# Altium PCB PCB_ESPDMX V2.pcbdoc
Units mil, origin at the board's own origin, x right, y up, seen from the top; angles counter-clockwise.
Board outline 7260 x 3730 mil, 2 copper layers (Top Layer, Bottom Layer); 60 components, 70 nets, 271 pads, 69 vias.
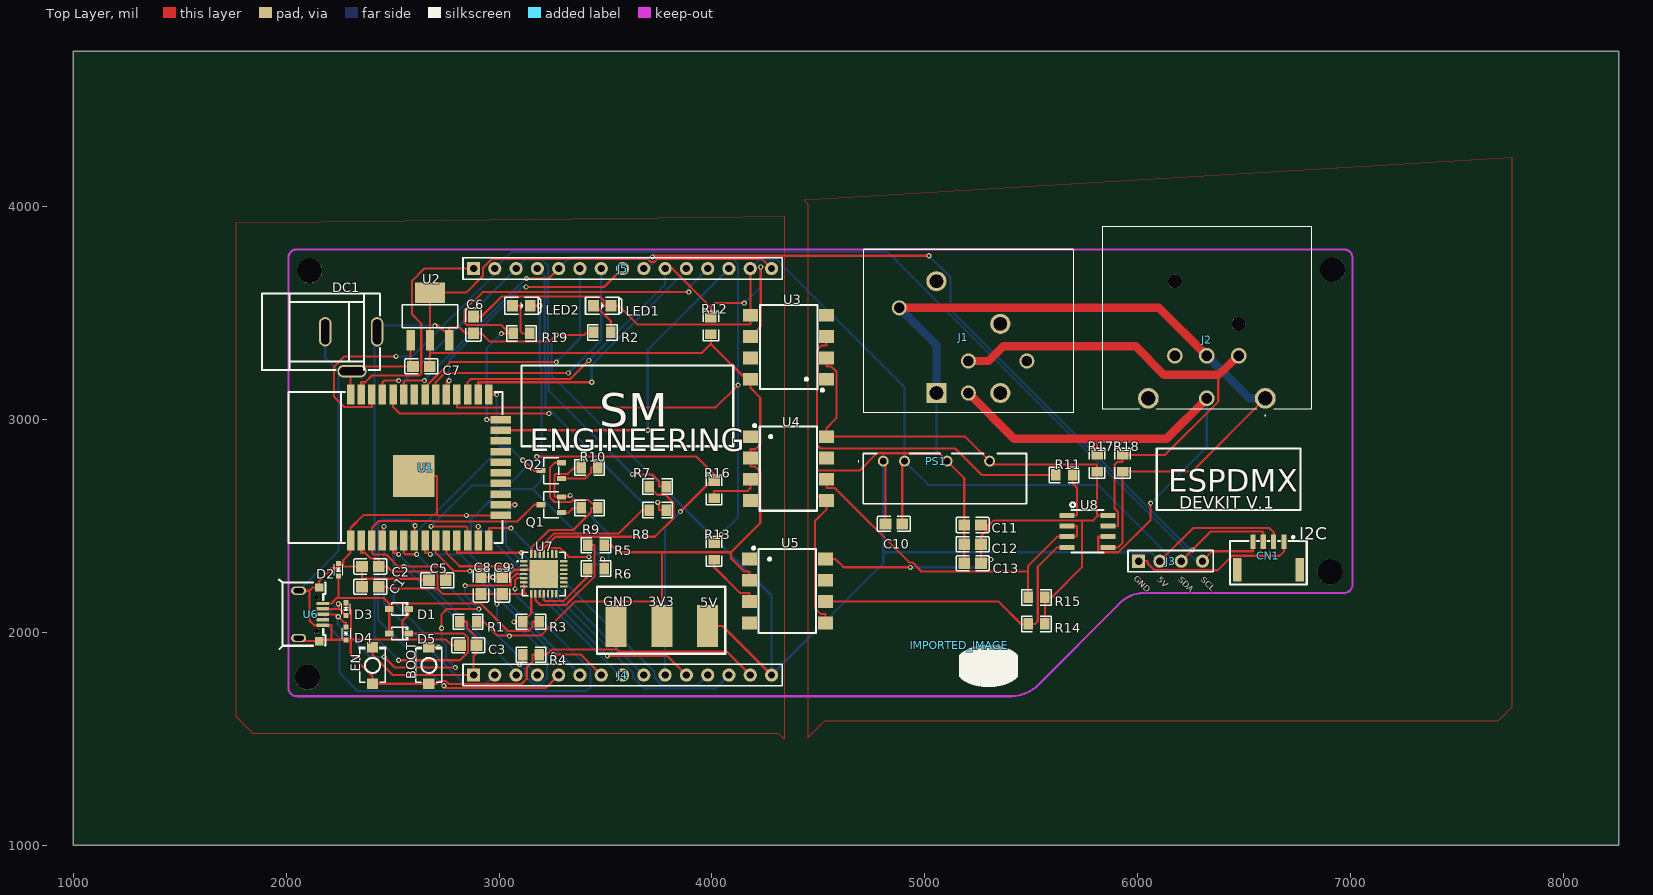
[diagram p0: Top Layer view]
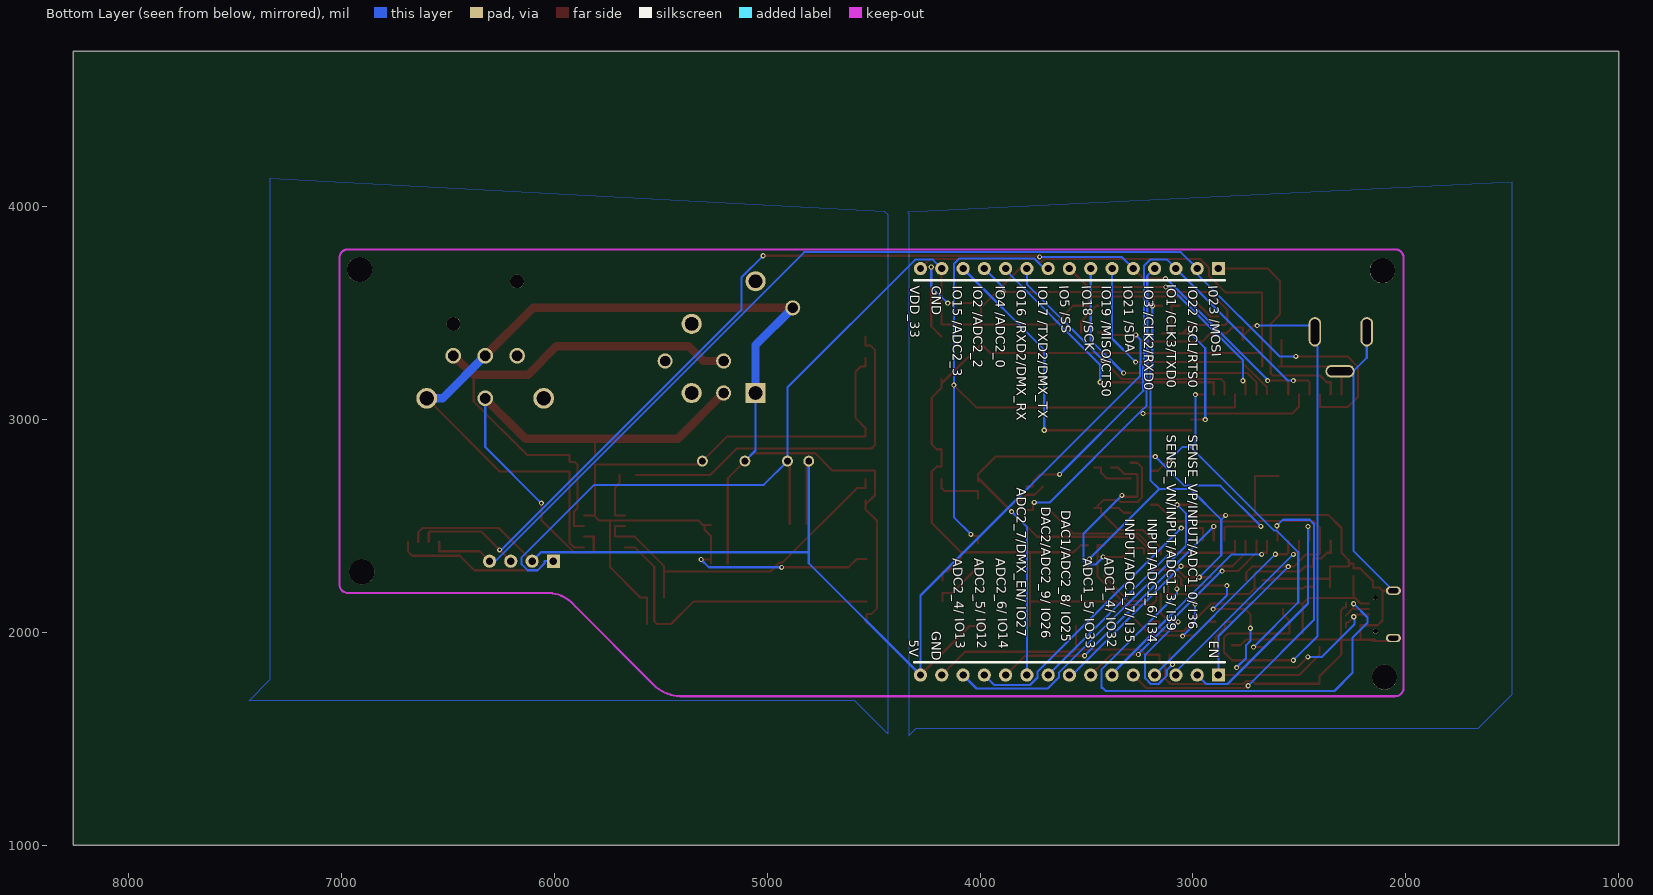
[diagram p1: Bottom Layer view, seen from below]

## Layer stack, top to bottom
Top Layer: signal copper (thickness not stored)
Dielectric: dielectric 12.6, FR-4, Dk 4.8
Bottom Layer: signal copper (thickness not stored)

## Board outline
8260,1000 1000,1000 1000,4730 8260,4730

## Components (designator, comment, footprint, x,y, rotation, side; value= is the part's Value field where it differs from the comment)
BOOT "TS-1088R-02026" SW-SMD_L3.9-W3.0-P4.45 2670,1845 r90 top
C1 "22uF" C0805 2395,2215 r0 top
C2 "0.1u" C0805 2395,2310 r0 top
C3 "0.1u" C0805 2855,1940 r0 top
C5 "0.1u" C0805 2710,2245 r180 top
C6 "22uF" C0805 2880,3445 r270 top
C7 "22uF" C0805 2635,3250 r0 top
C8 "4.7uF" C0805 2915,2220 r270 top
C9 "0.1u" C0805 3015,2220 r270 top
C10 "4.7uF" C0805 4855,2510 r180 top
C11 "0.1u" C0805 5225,2505 r0 top
C12 "0.1u" C0805 5225,2415 r0 top
C13 "0.1u" C0805 5225,2325 r0 top
CN1 "BM04B-GHS-TBT(LF)(SN)" CONN-SMD_4P-P1.25_BM04B-GHS-TBT-LF-SN 6615.05,2360.05 r0 top
D1 "BAT760-7" SOD-323_L1.8-W1.3-LS2.5-RD 2530,2110 r180 top
D2 "LESD5D5.0CT1G" SOD-523_L1.2-W0.8-LS1.6-BI 2245,2295 r90 top
D3 "LESD5D5.0CT1G" SOD-523_L1.2-W0.8-LS1.6-BI 2280,2110 r90 top
D4 "LESD5D5.0CT1G" SOD-523_L1.2-W0.8-LS1.6-BI 2280,1995 r270 top
D5 "BAT760-7" SOD-323_L1.8-W1.3-LS2.5-RD 2530,1995 r180 top
DC1 "DC-470-2.1GP" DC-IN-TH_DC-470-2.1GP 2305,3320 r0 top
EN "TS-1088R-02026" SW-SMD_L3.9-W3.0-P4.45 2405,1845 r90 top
IMPORTED_IMAGE "IMPORTED_IMAGE" IMPORTED_IMAGE 5161.84,1940.86 r0 top
J1 "DMX-5 F" AC5FAHAUB 5055,3125 r0 top
J2 "DMX-5 M" AC5MAHAUB 6600,3100 r0 top
J3 "HDR-M-2.54_1x4" HDR-M-2.54_1X4 6155,2335 r0 top
J4 "HDR-M-2.54_1x15" HDR-M-2.54_1X15 3580,1800 r0 top
J5 "HDR-M-2.54_1x15" HDR-M-2.54_1X15 3580,3710 r0 top
LED1 "LED-0805_R" LED0805_RED 3485.05,3534.95 r0 top
LED2 "LED-0805_B" LED0805_BLUE 3105.05,3534.95 r0 top
PS1 "TEA_1-0505E" TEA10505E 4805,2805 r0 top
Q1 "SS8050-G" SOT-23-3_L2.9-W1.6-P1.90-LS2.8-BR 3245,2600 r0 top
Q2 "SS8050-G" SOT-23-3_L2.9-W1.6-P1.90-LS2.8-BR 3245,2760 r0 top
R1 "10k" R0805 2855,2050 r0 top
R2 "2k" R0805 3485,3410 r180 top
R3 "22.1k" R0805 3150,2050 r180 top
R4 "47.5k" R0805 3150,1895 r180 top
R5 "2k" R0805 3455,2410 r180 top
R6 "10k" R0805 3455,2300 r180 top
R7 "0R" R0805 3745,2685 r0 top
R8 "0R" R0805 3745,2575 r0 top
R9 "10k" R0805 3425,2585 r180 top
R10 "10k" R0805 3425,2775 r0 top
R11 "470R" R0805 5655,2740 r0 top
R12 "470R" R0805 3995,3440 r90 top
R13 "330R" R0805 4010,2380 r90 top
R14 "470R" R0805 5525,2040 r0 top
R15 "470R" R0805 5525,2165 r0 top
R16 "330R" R0805 4010,2670 r90 top
R17 "680R" R0805 5810,2795 r90 top
R18 "680R" R0805 5930,2795 r270 top
R19 "2k" R0805 3105,3405 r180 top
U1 "ESP32-WROOM-32(16MB)" WIFIM-SMD_39P-L25.5-W18.0-P1.27 2655,2775 r90 top
U2 "AMS1117-3.3V" SOT-223-4_L6.5-W3.5-P2.30-LS7.0-BR 2675,3485 r270 top
U3 "6N137S" SOP-8_L9.8-W6.6-P2.54-LS10.3-BL 4360,3340 r90 top
U4 "6N137S" SOP-8_L9.8-W6.6-P2.54-LS10.3-BL 4360,2770 r270 top
U5 "6N137S" SOP-8_L9.8-W6.6-P2.54-LS10.3-BL 4355,2195 r270 top
U6 "USB-MR-D-023" MICRO-USB-SMD_USB-MR-D-023 2115,2085 r270 top
U7 "CP2102N-A02-GQFN28R" QFN-28_L5.0-W5.0-P0.50-TL-EP3.3 3210,2275 r0 top
U8 "MAX3485CSA+T" SO-8_L4.9-W3.9-P1.27-LS6.0-BL 5765,2475 r270 top
? "" ? 2073.44,2755 r0 top

## Footprints (in the part's own frame and the unit in brackets; to place one, negate y for a bottom-side part, rotate by r counter-clockwise, add the part's x,y. Pads: shape width x height; smd on the part's side, far side on the other; paste and mask are expansions set on the pad)
AC5FAHAUB [mil]
  rect 94.49x94.49 hole 63 paste+0 mask+2: 1(0,0)
  round 70.87 hole 47.24 slot 47.44 at 0 deg paste+0 mask+2: 2(150,150.39) 3(150,0) 4(424.8,150.39) G1(-174.8,400.39)
  round 94.49 hole 63 paste+0 mask+2: 5(300,0) 7(0,525.2) 8(300,325.2)
  silkscreen extent -342,-93 642,675
AC5MAHAUB [mm]
  round 2.475 hole 1.65 slot 1.655 at 0 deg paste+0 mask+0.051: 1(0,0) 5(-13.96,0)
  round 1.875 hole 1.25 paste+0 mask+0.051: 2(-3.17,5.08) 3(-6.98,0) 4(-10.79,5.08) G1(-6.98,5.08)
  round 1.65 hole 1.65 unplated paste+0: ""(-10.79,13.97) ""(-3.17,8.89)
  silkscreen extent -19.48,-2.1 5.52,20.48
C0805 [mm]
  rect 1.41x1.35 smd paste-100 mask+0.051: 1(-1,0) 2(1,0)
  silkscreen extent -1.96,-0.9 1.96,0.9
CONN-SMD_4P-P1.25_BM04B-GHS-TBT-LF-SN [mm]
  rect 0.6x1.7 smd paste+0 mask+0.051: 1(1.875,1.675) 2(0.625,1.675) 3(-0.625,1.675) 4(-1.875,1.675)
  rect 1x2.8 smd paste+0 mask+0.051: 5(3.725,-1.675) 6(-3.725,-1.675)
  silkscreen extent -4.57,-3.43 4.57,2.35
DC-IN-TH_DC-470-2.1GP [mm]
  oval 1.5x3.5 hole 1 slot 3 at 90 deg paste+0 mask+0.051: 1(3.1,2.35) 2(-3.1,2.35)
  oval 3.5x1.5 hole 1 slot 3 at 0 deg paste+0 mask+0.051: 3(0.1,-2.35)
  silkscreen extent -10.64,-2.22 3.42,6.92
HDR-M-2.54_1X4 [mil]
  rect 62x62 hole 35 paste+0 mask+2: 1(-150,0)
  round 62 hole 35 paste+0 mask+2: 2(-50,0) 3(50,0) 4(150,0)
  silkscreen extent -200,-50 200,50
HDR-M-2.54_1X15 [mil]
  rect 62x62 hole 35 paste+0 mask+2: 1(-700,0)
  round 62 hole 35 paste+0 mask+2: 2(-600,0) 3(-500,0) 4(-400,0) 5(-300,0) 6(-200,0) 7(-100,0) 8(0,0) 9(100,0) 10(200,0) 11(300,0) 12(400,0) 13(500,0) 14(600,0) 15(700,0)
  silkscreen extent -750,-50 750,50
IMPORTED_IMAGE [mil]
  silkscreen extent 0,-197 276,0
LED0805_BLUE [mil]
  rect 51.2x55.1 smd paste+0 mask+2: 1(-41.35,0) 2(41.35,0)
  silkscreen extent -79,-39 91,39
LED0805_RED [mil]
  rect 51.2x55.1 smd paste+0 mask+2: 1(-41.35,0) 2(41.35,0)
  silkscreen extent -79,-39 91,39
MICRO-USB-SMD_USB-MR-D-023 [mm]
  rect 0.4x1.5 smd paste-100 mask+0.05: 1(-1.3,1.45) 2(-0.65,1.45) 3(0.001,1.45) 4(0.651,1.45) 5(1.3,1.45)
  rect 1x1 smd paste-100 mask+0.05: 6(-3.2,1) 7(3.2,1)
  oval 1x1.8 hole 0.6 slot 1.2 at 90 deg paste+0 mask+0.05: 6(-2.826,-1.45) 7(2.824,-1.45)
  round 0.6 hole 0.6 unplated paste+0: ""(-2,0.7) ""(2,0.7)
  silkscreen extent -4.15,-3.8 4.15,1.75
QFN-28_L5.0-W5.0-P0.50-TL-EP3.3 [mm]
  rect 0.905x0.28 smd paste-100 mask+0.051: 1(-2.377,1.5) 2(-2.377,1) 3(-2.377,0.5) 4(-2.377,0) 5(-2.377,-0.5) 6(-2.377,-1) 7(-2.377,-1.5) 15(2.377,-1.5) 16(2.377,-1) 17(2.377,-0.5) 18(2.377,0) 19(2.377,0.5) 20(2.377,1) 21(2.377,1.5)
  rect 0.28x0.905 smd paste-100 mask+0.051: 8(-1.5,-2.377) 9(-1,-2.377) 10(-0.5,-2.377) 11(0,-2.377) 12(0.5,-2.377) 13(1,-2.377) 14(1.5,-2.377) 22(1.5,2.377) 23(1,2.377) 24(0.5,2.377) 25(0,2.377) 26(-0.5,2.377) 27(-1,2.377) 28(-1.5,2.377)
  rect 3.35x3.35 smd paste-100 mask+0.051: 29(0,0)
  silkscreen extent -3.2,-2.58 2.58,2.58
R0805 [mil]
  rect 44.59x54.21 smd paste-3937.01 mask+2: 1(-39.37,0) 2(39.37,0)
  silkscreen extent -69,-36 69,36
SO-8_L4.9-W3.9-P1.27-LS6.0-BL [mm]
  rect 0.6x1.8 smd paste+0 mask+0.05: 1(-1.905,-2.45) 2(-0.635,-2.45) 3(0.635,-2.45) 4(1.905,-2.45) 5(1.905,2.45) 6(0.635,2.45) 7(-0.635,2.45) 8(-1.905,2.45)
  silkscreen extent -3.46,-2.06 2.54,1.91
SOD-323_L1.8-W1.3-LS2.5-RD [mm]
  rect 1x0.75 smd paste+0 mask+0.051: 1(-1.173,0) 2(1.173,0)
  silkscreen extent -1.08,-0.8 0.9,0.8
SOD-523_L1.2-W0.8-LS1.6-BI [mm]
  rect 0.6x0.6 smd paste+0 mask+0.051: 1(-0.75,0) 2(0.75,0)
  silkscreen extent -0.65,-0.5 0.65,0.5
SOP-8_L9.8-W6.6-P2.54-LS10.3-BL [mm]
  rect 1.525x1.78 smd paste+0 mask+0.051: 1(-3.81,-4.545) 2(-1.27,-4.545) 3(1.27,-4.545) 4(3.81,-4.545) 5(3.81,4.545) 6(1.27,4.545) 7(-1.27,4.545) 8(-3.81,4.545)
  silkscreen extent -5.27,-4.19 5.03,3.39
SOT-23-3_L2.9-W1.6-P1.90-LS2.8-BR [mm]
  rect 1.07x0.6 smd paste+0 mask+0.051: 1(1.235,-0.95) 2(1.235,0.95) 3(-1.235,0)
  silkscreen extent -0.88,-1.54 0.88,1.54
SOT-223-4_L6.5-W3.5-P2.30-LS7.0-BR [mm]
  rect 2.47x0.98 smd paste+0 mask+0.051: 1(2.835,-2.3) 2(2.835,0) 3(2.835,2.3)
  rect 2.47x3.6 smd paste+0 mask+0.051: 4(-2.835,0)
  silkscreen extent -1.37,-3.33 1.37,3.33
SW-SMD_L3.9-W3.0-P4.45 [mm]
  rect 1.23x1.36 smd paste+0 mask+0.051: 1(-2.185,0) 2(2.185,0)
  silkscreen extent -2.03,-1.62 2.25,1.62
TEA10505E [mil]
  round 51.3 hole 29.92 slot 30.12 at 0 deg paste+0 mask+2: 1(0,0) 2(100,0) 4(300,0) 6(500,0)
  silkscreen extent -118,-201 673,35
WIFIM-SMD_39P-L25.5-W18.0-P1.27 [mm]
  rect 2.4x0.9 smd paste+0 mask+0.051: 1(-8.7,8.965) 2(-8.7,7.695) 3(-8.7,6.425) 4(-8.7,5.155) 5(-8.7,3.885) 6(-8.7,2.615) 7(-8.7,1.345) 8(-8.7,0.075) 9(-8.7,-1.195) 10(-8.7,-2.465) 11(-8.7,-3.735) 12(-8.7,-5.005) 13(-8.7,-6.275) 14(-8.7,-7.545) 25(8.7,-7.545) 26(8.7,-6.275) 27(8.7,-5.005) 28(8.7,-3.735) 29(8.7,-2.465) 30(8.7,-1.195) 31(8.7,0.075) 32(8.7,1.345) 33(8.7,2.615) 34(8.7,3.885) 35(8.7,5.155) 36(8.7,6.425) 37(8.7,7.695) 38(8.7,8.965)
  rect 0.9x2.4 smd paste+0 mask+0.051: 15(-5.715,-8.965) 16(-4.445,-8.965) 17(-3.175,-8.965) 18(-1.905,-8.965) 19(-0.635,-8.965) 20(0.635,-8.965) 21(1.905,-8.965) 22(3.175,-8.965) 23(4.445,-8.965) 24(5.715,-8.965)
  rect 5x5 smd paste+0 mask+0.051: 39(-1.017,1.422)
  silkscreen extent -9.02,-9.17 9.02,16.39
? [mil]

## Free pads (board coordinates)
  rect 98.42x196.85 smd paste+0 mask+4: 1(3550,2030) 1(3765,2030) 1(3980,2030)
  round 118.11 hole 118.11 unplated paste+0: ""(2100,1790) ""(2110,3700) ""(6905,2285) ""(6915,3705)

## Via types
v1: diameter 24.02, hole 12.01, Top Layer to Bottom Layer, tented both sides, 69 vias

## Nets (pads, with @x,y where several pads share a name; then routed paths per layer and width w, separated by ;. In a path a pad name is that pad's centre, name@x,y a point inside that pad or via, vN(x,y) a via of type N, cw(c..) or ccw(c..) an arc to the next point about the centre after c; other vN are vias at no path point)
485/RX: J5.9 R13.2 U1.28 | length 3270.5
  Top Layer w10: U1.28 2802.05,3059.34 2803.8,3057.58 4018.41,3057.58 v1(4123.13,3162.29) ; R13.2 4010.01,2452.6 4034.72,2452.6 v1(4042.92,2460.8)
  Bottom Layer w10: J5.9 3698.89,3710 3746.62,3757.73 4096.74,3757.73 4123.12,3731.35 v1(4123.13,3162.29) 4123.12,2541.01 v1(4042.92,2460.8)
485/TX: J5.10 R12.2 U1.27 U3.6 | length 2303.8
  Top Layer w10: U1.27 2852.05,3175.69 2868.09,3191.73 3335.53,3191.73 v1(3421.74,3277.94) ; J5.10 3812.8,3710 3995.01,3527.79 ; R12.2 3995.01,3512.6 3995.01,3527.79 ; v1(4152.1,3547.29) 4014.51,3547.29 3995.01,3527.79 ; U3.6 4229.56,3438.5 v1(4229.58,3717.08)
  Bottom Layer w10: v1(3421.74,3277.94) 3780.01,3636.21 J5.10 ; v1(4152.1,3547.29) 4229.57,3624.77 v1(4229.58,3717.08)
A: J1.3 J2.3 R17.2 U8.6 | length 2471
  Top Layer w10: R17.2 5810.01,2867.6 5810.01,2909.5 ; U8.6 5815.1,2450 5815.06,2449.95 5815.06,2380.12 5818.19,2376.98 5909.98,2376.98 6061.48,2528.47 v1(6061.48,2607.67)
  Top Layer w39.37: J1.3 5420.51,2909.5 5810.01,2909.5 6134.7,2909.5 J2.3
  Bottom Layer w10: v1(6061.48,2607.67) 6325.2,2871.4 J2.3
B: J1.2 J2.2 R18.1 U8.7 | length 2500.5
  Top Layer w10: U8.7 5907.82,2500 5907.9,2500.07 5907.9,2566.37 5891.4,2582.87 5891.4,2787.45 5905.1,2801.15 5930.01,2801.15 R18.1 6128.86,2834.37 6379.22,3084.72 6379.22,3223.55
  Top Layer w39.37: J1.2 5300.39,3275.39 5370,3345 5990,3345 6125,3210 6379.22,3210 J2.2
CLK: U1.20
CMD: U1.19
DMX_EN: J4.10 R16.2 U1.12 | length 2787.9
  Top Layer w10: v1(2680.38,2498.57) 2844.14,2498.57 2852.05,2490.66 U1.12 ; v1(3176.71,2826.61) 3925.99,2826.61 4010.01,2742.6 R16.2@4010.01,2725.99 ; v1(3852.11,2568.09) R16.2@4010.01,2725.99 ; R16.2 R16.2@4010.01,2725.99
  Bottom Layer w10: v1(2680.38,2498.57) 2871.66,2689.86 3039.95,2689.86 v1(3176.71,2826.61) ; J4.10 3780.01,2495.99 v1(3852.11,2568.09)
DTR: Q2.2 R9.1 U7.28 | length 880.3
  Top Layer w10: U7.28@3150.95,2368.6 3150.95,2397.35 3235.3,2481.7 3349.03,2481.7 3431.16,2563.82 3431.16,2585 R9.1@3447.76,2585 ; Q2.2 3261.64,2797.4 3238.43,2774.19 3238.43,2634.81 3260.11,2613.12 3338.47,2613.12 3348.43,2623.09 3419.2,2623.09 3447.76,2594.53 R9.1@3447.76,2585 ; R9.1 R9.1@3447.76,2585
EN: C3.2 C5.1 EN.2 J4.1 Q1.3 R1.1 U1.3 | length 2884.6
  Top Layer w10: EN.2 2405.01,1895.88 2500.89,1800 J4.1 2880.01,1888.13 2894.38,1902.5 C3.2 2894.38,1977.51 2848.86,2023.03 2848.86,2050 R1.1 ; C5.1 2749.38,2282.51 2722.39,2309.5 v1(2552.17,2309.5) 2526.41,2309.5 2469.61,2366.31 2410.05,2366.31 2402.05,2374.31 U1.3 2402.05,2461.58 2402.05,2490.66 2435.78,2524.4 2687.05,2524.4 2690.14,2521.3 3085.7,2521.3 3164.39,2600 Q1.3
  Bottom Layer w10: v1(2552.17,2309.5) 2880.01,1981.66 J4.1
EXT5V: C6.2 C10.2 CN1.2 D1.1 D5.1 DC1.1 J3.2 J4.15 pad.1@3980,2030 PS1.1 R2.2 U2.3 | length 9527.2
  Top Layer w10: v1(2528.2,1869.63) 2816.07,1869.63 2854.38,1907.93 2854.38,1974.65 2834.03,1995 D5.1 2545.55,1995 2545.55,2053.7 2576.16,2084.31 D1.1 ; v1(2698.61,3441.64) 2715.41,3441.64 U2.3@2765.55,3391.49 ; U2.3 U2.3@2765.55,3391.49 ; R2.2 3412.41,3410 3400.28,3397.87 v1(3268.68,3397.87) 3237.26,3366.45 2956.7,3366.45 2917.51,3405.63 C6.2 2842.51,3405.63 2815.2,3432.94 2765.55,3432.94 U2.3@2765.55,3391.49 ; pad.1@3980.01,2030 4050.01,2030 J4.15 ; PS1.1 4815.64,2794.37 C10.2 ; J3.2 6260.98,2490.97 6619.1,2490.97 6639.65,2470.42 CN1.2@6639.65,2425.99
  Bottom Layer w10: v1(2528.2,1869.63) 2414.95,1982.88 2414.95,3400.41 2427.05,3412.52 2456.18,3441.64 v1(2698.61,3441.64) ; v1(3268.68,3397.87) 3246.28,3375.47 3246.28,3260.89 3249.47,3257.69 3249.47,3203.86 4280.01,2173.33 J4.15 4805.01,2325 4805.01,2377.15 ; PS1.1 4805.01,2377.15 ; J3.2 6062.85,2377.15 4805.01,2377.15
GND: BOOT.1 C1.1 C2.1 C3.1 C5.2 C6.1 C7.1 C8.1 C9.1 C10.1 CN1.1 D2.2 D3.2 D4.2 DC1.2 DC1.3 EN.1 J3.1 J4.14 J5.14 LED1.2 LED2.2 pad.1@3550,2030 PS1.2 R4.1 R6.1 U1.1 U1.15 U1.38 U1.39 U2.1 U3.5 U6.5 U6.6 U6.7 U7.3 U7.29 | length 15797.6
  Top Layer w10: U6.7@2057.93,1973.78 2072.68,1959.02 U6.7@2139.07,1959.02 ; U6.6@2057.93,2196.22 2108.99,2196.22 ; U6.7@2154.38,1959.02 U6.7@2139.07,1959.02 ; D3.2 2280.01,2116.79 2291.38,2116.79 2303.49,2104.67 2303.49,1966.22 ; U1.38 2302.05,3220.58 DC1.3 2331.47,3250 C7.1@2584.45,3250 ; C1.1 2355.64,2248.55 2355.64,2252.56 ; U2.1@2584.45,3373.39 C7.1@2584.45,3250 ; C7.1 2590.05,3250 C7.1@2584.45,3250 ; U1.39 2708.38,2734.96 2708.38,2552.7 ; C5.2 2631.95,2245 2624.39,2252.56 2355.64,2252.56 ; C3.1 2776.95,1940 2750.72,1966.22 2303.49,1966.22 ; C6.1 2898.76,3484.37 2917.51,3484.37 3011.74,3578.59 3182.89,3578.59 ; C8.1 v1(2969.65,2259.37) C9.1 3036.91,2259.37 3072.22,2294.68 U7.3 3190.32,2294.68 U7.29 ; U1.15 v1(2846.14,2550) 2711.07,2550 2708.38,2552.7 ; LED2.2 3164.62,3535 v1@3182.89,3535 ; v1(3191.12,3535) v1@3182.89,3535 ; v1(3486.4,2345.21) 3493.57,2338.04 3494.38,2338.04 R6.1 ; pad.1@3550.01,2030 3550.01,1920.65 ; J4.14 4070.7,1909.31 3561.34,1909.31 3550.01,1920.65 ; J5.14 4181.06,3708.94 U3.5 4181.06,3449.05 4178.11,3446.1 3651.78,3446.1 3562.89,3535 LED1.2 3489.82,3535 3489.82,3562.4 3473.64,3578.59 3182.89,3578.59 ; C10.1 4894.38,2794.37 PS1.2 ; J3.1 6046.94,2335 6046.94,2324.52 6079.31,2292.15 6376.14,2292.15 6444.19,2360.2 6667.49,2360.2 6688.85,2381.56 CN1.1@6688.85,2425.99 ; 2108.99,2196.22 2123.76,2210.98 2139.07,2210.98 2154.38,2210.98 2154.38,2241.6 2214.57,2301.79 2245.01,2301.79 D2.2 2250.7,2324.53 D2.2@2256.38,2324.53 ; 2108.99,2196.22 2108.99,2056.44 2131.62,2033.81 U6.5 2212.55,2033.81 2212.55,1965.47 ; U6.7@2139.07,1959.02 2145.51,1965.47 2212.55,1965.47 ; 2212.55,1965.47 D4.2 2302.74,1965.47 2303.12,1965.47 ; D2.2@2256.38,2324.53 2270.91,2310 C2.1 2355.64,2252.56 ; D2.2@2256.38,2324.53 2267.74,2324.53 2267.74,2340.01 2302.05,2374.31 U1.1 2302.05,2490.66 2364.09,2552.7 2708.38,2552.7 ; 2303.12,1965.47 2303.12,1896 2405.01,1794.12 EN.1 BOOT.1 2707.7,1758.98 2721.38,1772.65 2749.91,1772.65 2764.55,1758.02 3105.53,1758.02 3130.01,1782.5 3130.01,1835.63 3156.16,1861.78 3156.16,1895 R4.1 3222.61,1895 3222.61,1895.43 3247.82,1920.65 3550.01,1920.65 ; 2303.12,1965.47 2303.12,1965.85 2303.49,1966.22 ; v1@3182.89,3535 3182.89,3578.59
  Bottom Layer w10: U6.6@2057.93,2196.22 2245.95,2384.25 DC1.3@2245.95,3227.48 ; DC1.2 2182.97,3290.47 DC1.3@2245.95,3227.48 ; DC1.3 DC1.3@2245.95,3227.48 ; v1(2846.14,2550) 2866.72,2529.43 ; v1(2969.65,2259.37) 2866.72,2362.3 2866.72,2529.43 ; v1(3191.12,3535) 3191.11,3248.31 3199.68,3239.74 3199.68,2715.84 3157.72,2673.88 ; v1(3486.4,2345.21) 3157.72,2673.88 ; J5.14 4222.02,3752.01 4304.99,3752.01 4905.01,3152 PS1.2 5016.48,2693.52 5813.24,2693.52 6154.02,2352.75 6154.02,2320.55 6125.76,2292.29 6079.16,2292.29 6046.94,2324.52 6046.94,2335 J3.1 ; 2866.72,2529.43 3011.16,2673.88 3157.72,2673.88
GND-ISO: C11.1 C12.1 C13.1 J1.1 J1.G1 J2.1 J2.G1 PS1.4 R18.2 U4.5 U5.5 U8.5 | length 5918.7
  Top Layer w10: U5.5 4533.94,2085.95 4510.91,2085.95 4483.8,2113.07 4483.8,2523.9 4538.94,2579.05 U4.5@4538.94,2599.53 ; U4.5 U4.5@4538.94,2599.53 ; C13.1 C12.1 C11.1 5185.64,2724.37 PS1.4 5067.85,2842.15 4775.1,2842.15 4693.94,2761 4495.84,2761 4492.93,2758.09 4492.93,2645.55 U4.5@4538.94,2599.53 ; U8.5 5907.82,2400 5930.01,2422.18 R18.2 6255.64,2755.63 J2.1
  Top Layer w39.37: J1.G1 6099.81,3525.39 J2.G1
  Bottom Layer w10: J1.1 5055.01,2855 PS1.4
  Bottom Layer w39.37: J1.G1 5055.01,3350.59 J1.1 ; J2.G1 6525.2,3100 J2.1
IO0: BOOT.2 Q2.3 U1.25 | length 1812.1
  Top Layer w10: BOOT.2 2707.7,1931.02 v1(2715.42,1931.02) ; U1.25 v1(2988.59,3117.51) ; v1(3111.25,2808.92) 3115.47,2808.92 3164.39,2760 Q2.3
  Bottom Layer w10: v1(2715.42,1931.02) 2504.95,2141.48 2504.95,2376.55 2606.84,2478.44 2617.3,2478.44 3009.39,2870.53 ; v1(2988.59,3117.51) 2988.59,2891.34 3009.39,2870.53 ; v1(3111.25,2808.92) 3049.64,2870.53 3009.39,2870.53
IO2: J5.12 R19.2 U1.24 | length 2096.9
  Top Layer w10: v1(2941.84,3000) U1.24@3007.95,3000 ; v1(3010.73,3404.43) 3031.84,3404.43 3032.41,3405 R19.2 3049.03,3405 3009.66,3444.37 2849.26,3444.37 2838.74,3454.89 2838.74,3515.53 2922.53,3599.31 v1(3891,3599.31)
  Bottom Layer w10: v1(2941.84,3000) 2941.84,3335.54 v1(3010.73,3404.43) ; v1(3891,3599.31) 3891.01,3621 J5.12
IO4: J5.11 U1.26 | length 1309.8
  Top Layer w10: U1.26 2902.05,3175.69 2902.09,3175.74 v1@3435.14,3175.74
  Bottom Layer w10: v1@3435.14,3175.74 3435.14,3256.39 3880.01,3701.25 J5.11
  other v1: 3435.15,3175.74
IO5: J5.8 U1.29 | length 1164.2
  Top Layer w10: U1.29 2752.05,3175.69 2757.68,3175.69 v1(2764.82,3182.83) ; v1(3126.67,3623.21) 3493.22,3623.21 J5.8
  Bottom Layer w10: v1(2764.82,3182.83) 2764.82,3279.76 3108.26,3623.21 v1(3126.67,3623.21)
IO12: J4.12 U1.14 | length 1426.7
  Top Layer w10: U1.14 2952.05,2490.66 v1(3054.64,2490.66)
  Bottom Layer w10: v1(3054.64,2490.66) 3730.01,1815.28 3730.01,1788.68 3765.7,1752.99 3932.99,1752.99 J4.12
IO13: J4.13 U1.16 | length 1640.9
  Top Layer w10: U1.16 3066.14,2600 v1(3074.22,2600)
  Bottom Layer w10: v1(3074.22,2600) 3031.64,2557.42 3031.64,2408.24 3630.01,1809.88 3630.01,1788.67 3682.05,1736.63 4016.64,1736.63 J4.13
IO14: J4.11 U1.13 | length 1332.3
  Top Layer w10: U1.13 v1(2902.05,2497.78) ; v1(3509.09,1890.73) 3789.28,1890.73 J4.11
  Bottom Layer w10: v1(2902.05,2497.78) v1(3509.09,1890.73)
IO15: J5.13 U1.23 | length 1608.6
  Top Layer w10: U1.23@3007.95,2950 v1(3698.5,2950)
  Bottom Layer w10: v1(3698.5,2950) 3698.51,3328.5 J5.13
IO18: J5.7 U1.30 | length 1254.7
  Top Layer w10: U1.30 2702.05,3175.69 2745.49,3219.13 v1(3325.9,3219.13)
  Bottom Layer w10: v1(3325.9,3219.13) 3480.01,3373.24 J5.7
IO19: J5.6 U1.31 | length 1186.1
  Top Layer w10: U1.31 2652.05,3151.72 2770.72,3270.4 v1(3269.26,3270.4)
  Bottom Layer w10: v1(3269.26,3270.4) 3380.01,3381.15 J5.6
IO23: J5.1 U1.37 | length 1124.2
  Top Layer w10: U1.37 2352.05,3175.69 2371.39,3175.69 2403.03,3207.32 2625.34,3207.32 2634.38,3216.35 2634.38,3451.17 2591.39,3494.15 2591.39,3653.31 2648.09,3710 J5.1
IO25: J4.8 U1.10 | length 1124
  Top Layer w10: U1.10 2752.05,2374.31 2815.28,2311.07 v1(3056.09,2311.07)
  Bottom Layer w10: v1(3056.09,2311.07) 3567.16,1800 J4.8
IO26: J4.9 U1.11 | length 1174
  Top Layer w10: U1.11 2802.05,2374.31 2802.09,2374.26 v1(3105.74,2374.26)
  Bottom Layer w10: v1(3105.74,2374.26) J4.9
IO32: J4.6 U1.8 | length 1026.8
  Top Layer w10: U1.8 2652.05,2374.31 2670.36,2374.31 v1(2677.57,2367.11)
  Bottom Layer w10: v1(2677.57,2367.11) 2817.68,2367.11 3380.01,1804.78 J4.6
IO33: J4.7 U1.9 | length 1076.1
  Top Layer w10: U1.9 2702.05,2374.31 2788.26,2288.09 v1(2862.72,2288.09) ; v1(3255.98,1896.31) 3383.7,1896.31 J4.7
  Bottom Layer w10: v1(2862.72,2288.09) 2867.68,2288.09 3255.97,1899.79 v1(3255.98,1896.31)
IO34: J4.4 U1.6 | length 924
  Top Layer w10: U1.6 2552.05,2374.31 2559.09,2367.26 v1@2612.74,2367.26
  Bottom Layer w10: v1@2612.74,2367.26 J4.4
  other v1: 2612.75,2367.26
IO35: J4.5 U1.7 | length 1721.8
  Top Layer w10: U1.7 2602.05,2498.15 v1(2605.32,2501.42) ; v1(2740.4,1749.67) 2751.09,1738.98 3218.99,1738.98 J4.5
  Bottom Layer w10: v1(2605.32,2501.42) 2577.41,2529.33 2450.72,2529.33 2430.93,2509.53 2430.93,2059.14 v1(2740.4,1749.67)
Q1_1: Q1.1 R9.2 | length 101.3
  Top Layer w10: Q1.1 3325.62,2562.6 3348.03,2585 R9.2
Q2_1: Q2.1 R10.2 | length 207
  Top Layer w10: Q2.1 3403.66,2722.6 3431.16,2750.09 3431.16,2775 R10.2
R2_1: LED1.1 R2.1 | length 163.8
  Top Layer w10: LED1.1 3452.82,3535 3524.38,3463.45 R2.1
R19_1: LED2.1 R19.1 | length 204.3
  Top Layer w10: LED2.1 3100.18,3535 3100.18,3415.97 3111.16,3405 R19.1
RTS: Q1.2 R10.1 U7.24 | length 1047.7
  Top Layer w10: U7.24 3229.7,2391.52 3235.57,2397.4 3285.55,2397.4 3328.24,2354.72 v1(3422.07,2354.72) ; v1(3333.4,2643.86) 3326.93,2637.4 3325.62,2637.4 Q1.2 3261.64,2637.4 3259.57,2639.47 3259.57,2737.4 3267.55,2745.39 3322.8,2745.39 3352.41,2775 R10.1
  Bottom Layer w10: v1(3333.4,2643.86) 3514.05,2463.2 3514.05,2337.16 3496.49,2319.59 3457.2,2319.59 v1(3422.07,2354.72)
RXD: R7.1 U7.25 | length 911.9
  Top Layer w10: U7.25 3210.01,2394.43 3265.32,2449.75 3731.74,2449.75 3820.05,2538.06 3820.05,2608.43 3781.57,2646.91 3743.72,2646.91 R7.1
RXD0: J5.4 R8.2 U1.34 | length 2265.1
  Top Layer w10: U1.34 2502.05,3059.34 2532.49,3028.9 v1(3234.56,3028.9) ; v1(3745.33,2611.34) 3751.16,2605.51 3751.16,2575 R8.2
  Bottom Layer w10: J5.4 3214.34,3675.67 3214.34,3247.67 3217.53,3244.47 3217.53,3065.54 3244.36,3038.71 ; v1(3234.56,3028.9) 3244.36,3038.71 ; v1(3745.33,2611.34) 3671.74,2611.34 3244.36,3038.71
S$8176: 
S$10742: 
S$49965: 
S$49975: 
S$49985: 
S$49995: 
S$50005: 
S$50015: 
S$717304: 
S$1072947: 
SCL: CN1.4 J3.4 J5.2 U1.36 | length 5617.7
  Top Layer w10: U1.36 2402.05,3059.34 2401.53,3058.82 2273.51,3058.82 2223.47,3108.85 2223.47,3246.51 2273.95,3296.99 v1(2515.98,3296.99) ; J3.4 6351.56,2381.56 6541.26,2381.56 CN1.4@6541.26,2425.99
  Bottom Layer w10: v1(2515.98,3296.99) 2593.2,3296.99 2980.01,3683.8 J5.2 3057.26,3787.25 4825.95,3787.25 6278.2,2335 J3.4
SD0: U1.21
SD1: U1.22
SD2: U1.17
SD3: U1.18
SDA: CN1.3 J3.3 J5.5 U1.33 | length 5163.7
  Top Layer w10: U1.33 2552.05,3175.69 2559.7,3183.35 v1(2649.2,3183.35) ; v1(3128.81,3662.96) 3232.97,3662.96 J5.5 ; v1(3720.67,3764.27) 3726.26,3769.87 v1(5019.61,3769.87) ; J3.3 6257.85,2387.84 6344.85,2474.84 6586.03,2474.84 6590.45,2470.42 CN1.3@6590.45,2425.99
  Bottom Layer w10: v1(2649.2,3183.35) 2649.2,3186.72 3125.43,3662.96 v1(3128.81,3662.96) ; J5.5 3334.28,3764.27 v1(3720.67,3764.27) ; v1(5019.61,3769.87) 5121.77,3667.7 5121.77,3514.88 6248.81,2387.85 v1@6257.85,2387.85
  other v1: 6257.86,2387.85
SENSOR_VN: J4.3 U1.5 | length 882.8
  Top Layer w10: U1.5 2502.05,2374.31 2520.68,2374.31 v1(2527.97,2367.02)
  Bottom Layer w10: v1(2527.97,2367.02) 3080.01,1814.98 J4.3
SENSOR_VP: J4.2 U1.4 | length 1124.8
  Top Layer w10: U1.4 2452.05,2490.66 v1(2459.21,2497.82)
  Bottom Layer w10: v1(2459.21,2497.82) 2459.2,2136.07 2837.26,1758.02 2938.03,1758.02 J4.2
TXD: R8.1 U7.26 | length 617.6
  Top Layer w10: U7.26 3190.32,2397.35 3258.7,2465.73 3563.14,2465.73 3672.41,2575 R8.1
TXD0: J5.3 R7.2 U1.35 | length 2428
  Top Layer w10: U1.35 2452.05,3175.69 2460.05,3183.69 v1(2527.61,3183.69) ; v1(3626.58,2742.31) 3718.76,2742.31 3751.16,2709.92 3751.16,2685 R7.2
  Bottom Layer w10: v1(2527.61,3183.69) 2553.7,3183.69 J5.3 3122.76,3752.75 3199.26,3752.75 3230.3,3721.71 3230.3,3254.28 3233.51,3251.08 3233.51,3135.38 v1(3626.58,2742.31)
U3_3: R11.1 U3.3 | length 1722.1
  Top Layer w10: U3.3 4538.94,3349.05 4515.91,3349.05 4492.93,3326.06 4492.93,2881.91 4510.4,2864.44 5142.88,2864.44 5267.31,2740 R11.1
U4_3: R16.1 U4.3 | length 251.5
  Top Layer w10: R16.1 4010.01,2663.85 4165.86,2663.85 4181.06,2679.05 U4.3
U4_6: R15.1 U4.6 U8.2 U8.3 | length 1680.8
  Top Layer w10: U4.6 4538.94,2679.05 4576.6,2679.05 4926.6,2329.05 4942.44,2329.05 4984.8,2286.69 5485.64,2286.69 ; R15.1 5485.64,2286.69 ; U8.2 5714.9,2500 5714.9,2450 5691.73,2450 U8.3 5622.19,2450 5485.64,2313.45 5485.64,2286.69
U5_3: R13.1 U5.3 | length 290.5
  Top Layer w10: R13.1 4010.01,2307.4 4131.45,2185.95 4176.06,2185.95 U5.3
U5_6: R14.1 U5.6 U8.4 | length 1477.6
  Top Layer w10: U5.6 5347.4,2145 5452.4,2040 R14.1 5518.85,2040 5531.1,2052.25 5531.1,2308.92 5622.19,2400 U8.4
U7_8: R3.2 R4.2 U7.8 | length 766.8
  Top Layer w10: v1(3069.53,2050) 3077.41,2050 R3.2 3150.95,2090.32 U7.8@3150.95,2181.4 ; v1(3095.83,1849.52) 3103.26,1856.96 3110.64,1856.96 R4.2
  Bottom Layer w10: v1(3069.53,2050) 3224.36,1895.18 3224.36,1784.97 3197.36,1757.97 3161.97,1757.97 3122.97,1796.97 3122.97,1822.38 v1(3095.83,1849.52)
U7_9: R5.2 U7.9 | length 551.9
  Top Layer w10: U7.9 3170.64,2152.66 3194.59,2128.7 3313.07,2128.7 3448.91,2264.53 3448.91,2409.95 3448.86,2410 R5.2
U7_11: R6.2 U7.11 | length 322.2
  Top Layer w10: U7.11 3210.01,2152.66 3215.41,2147.25 3300.93,2147.25 3415.64,2261.96 R6.2
U8_1: R11.2 U8.1 | length 244.9
  Top Layer w10: U8.1 5714.9,2550 5714.9,2681.43 5694.38,2701.96 R11.2
USB_DN: D3.1 U6.2 U7.5 | length 2444.9
  Top Layer w10: U6.2 2249.89,2110.58 D3.1 ; 2245,2110.58 v1(2245,2135) ; v1(3075,2205) 3075,2245 3085.31,2255.31 U7.5
  Bottom Layer w10: v1(2245,2135) 2180,2070 2180,2045 2250,1975 2250,1810 2335,1725 3410,1725 3425,1740 3430,1740 3430,1825 3075,2180 v1(3075,2205)
USB_DP: D4.1 U6.3 U7.4 | length 1737.5
  Top Layer w10: U6.3 2232.76,2084.98 v1(2244.1,2073.64) 2270.47,2047.27 2280.01,2047.27 D4.1 ; v1(2460,1885) 2510,1835 v1(2795,1835) ; v1(2730,2020) 2730,2085 2755,2110 v1(2905,2110) ; v1(2840,2220) 3055,2220 3055,2250 3080,2275 U7.4
  Bottom Layer w10: v1(2244.1,2073.64) 2240,2069.55 2240,2040 2395,1885 v1(2460,1885) ; v1(2730,2020) 2730,1960 2750,1940 2750,1880 v1(2795,1835) ; v1(2840,2220) 2840,2175 v1(2905,2110)
VBUS: D1.2 D2.1 D5.2 R3.1 U6.1 | length 1368.7
  Top Layer w10: U6.1 2212.55,2136.18 2238.68,2162.32 2245.01,2162.32 ; D2.1 2245.01,2242.73 2245.01,2162.32 ; D5.2 D1.2 2483.84,2135.69 ; R3.1 3156.16,2050 3156.16,2025.09 3138.11,2007.05 3042.11,2007.05 2913.41,2135.74 2483.89,2135.74 2483.84,2135.69 ; 2245.01,2162.32 2457.22,2162.32 2483.84,2135.69
VCC-ISO: C11.2 C12.2 C13.2 PS1.6 R14.2 R15.2 R17.1 U3.2 U4.8 U5.8 U8.8 | length 4229.6
  Top Layer w10: U5.8 4579.91,2345 4618.85,2306.07 v1(4932.92,2306.07) ; U3.2 4538.94,3249.05 4561.98,3249.05 4584.97,3226.06 4584.97,3006.97 4538.94,2960.95 U4.8 5190.01,2920 PS1.6 5321.15,2788.85 5810.01,2788.85 R17.1 5810.01,2555.1 5815.1,2550 ; C13.2 C13.2@5264.38,2342.83 ; C11.2 5295.19,2505 ; v1(5310.97,2342.83) C13.2@5264.38,2342.83 ; R14.2 R15.2 5597.6,2165 5738.35,2305.75 5738.35,2526.61 ; U8.8 5815.1,2550 ; C13.2@5264.38,2342.83 C12.2 5264.38,2452.51 5295.19,2483.32 5295.19,2505 ; 5295.19,2505 5303.06,2505 5324.68,2526.61 5738.35,2526.61 ; 5738.35,2526.61 5791.72,2526.61 5815.1,2550
  Bottom Layer w10: v1(4932.92,2306.07) 5274.2,2306.07 v1(5310.97,2342.83)
VDD33: C1.2 C2.2 C7.2 C8.2 C9.2 J5.15 pad.1@3765,2030 R1.2 R5.1 R12.1 U1.2 U2.2 U2.4 U3.8 U4.2 U5.2 U7.6 U7.7 | length 8321.1
  Top Layer w10: U1.2 2352.05,2374.31 2370.07,2374.31 2396.86,2347.51 2434.38,2347.51 C2.2 2473.07,2310 2496.55,2286.51 2700.39,2286.51 2710.01,2276.88 2710.01,2206.41 ; C1.2 2473.07,2215 2481.66,2206.41 2710.01,2206.41 ; C7.2 2674.38,3287.51 2675.01,3288.14 2675.01,3313.73 ; R1.2 2927.61,2050 2992.55,1985.06 v1@3048.09,1985.06 ; v1(2990.02,2133.22) 2990.01,2141.83 C9.2@3028.82,2180.63 ; v1(3048.09,1983.02) v1@3048.09,1985.06 ; U7.6 U7.7 3116.4,2189.23 3125,2180.63 C9.2@3028.82,2180.63 ; R5.1 3527.61,2410 3560.84,2376.77 3765.01,2376.77 ; pad.1@3765.01,2030 3765.01,2146.05 ; R12.1 3995.01,3355.59 ; U5.2 4176.06,2285.95 4153.03,2285.95 4089.7,2349.28 4089.7,2376.77 ; U3.8 U3.8@4181.06,3169.53 ; J5.15 4236.11,3753.89 3742.78,3753.89 3730.18,3741.29 3711.16,3741.29 3698.55,3753.89 2964.43,3753.89 2924.36,3713.83 2924.36,3675.67 2845.3,3596.61 U2.4 2675.01,3432.94 U2.2 2675.01,3313.73 ; 2675.01,3313.73 3953.14,3313.73 3995.01,3355.59 ; 2710.01,2206.41 2735.8,2180.63 C8.2 2977.51,2180.63 2996.26,2180.63 C9.2 C9.2@3028.82,2180.63 ; v1@3048.09,1985.06 3196.38,1985.06 3357.36,2146.05 3765.01,2146.05 ; 3765.01,2146.05 3765.01,2376.77 ; 3765.01,2376.77 4089.7,2376.77 ; 3995.01,3355.59 U3.8@4181.06,3169.53 ; 4089.7,2376.77 4227.09,2514.15 4227.09,2756.06 4204.1,2779.05 4181.06,2779.05 U4.2 4181.06,2860.95 4204.1,2860.95 4227.09,2883.94 4227.09,3103.03 4181.06,3149.05 U3.8@4181.06,3169.53
  Bottom Layer w10: v1(2990.02,2133.22) 2990.01,2041.09 v1(3048.09,1983.02)
pads on no net: CN1.5 CN1.6 J1.4 J1.5 J1.7 J1.8 J2. J2.4 J2.5 U1.32 U3.1 U3.4 U3.7 U4.1 U4.4 U4.7 U5.1 U5.4 U5.7 U6. U6.4 U7.1 U7.2 U7.10 U7.12 U7.13 U7.14 U7.15 U7.16 U7.17 U7.18 U7.19 U7.20 U7.21 U7.22 U7.23 U7.27

## Polygon pours and split planes (outlines as drawn)
GND on Top Layer (solid): 4340,3955 4340,1500 4315,1525 1845,1525 1765,1605 1765,3925
GND-ISO on Top Layer (solid): 4435,4030 4450,4015 4450,1505 4530,1585 7695,1585 7760,1650 7760,4230
GND on Bottom Layer (solid): 4335,1515 4300,1550 1660,1550 1500,1710 1500,4115 4340,3975 4335,3970 4335,1515
GND-ISO on Bottom Layer (solid): 4450,3980 4435,3965 4435,1525 4590,1680 7435,1680 7335,1780 7335,4135

## Keep-outs
Keep-Out Layer:
  lines w10 net S$10742: 5395,1700 ccw(c5401.12,1890.98) 5542.47,1762.41 ; 5902.53,2122.6 cw(c6033.42,2018.74) 6050,2185
  lines w10 net S$49965: 6969.66,3800 cw(c6969.66,3799.66) 6969.9,3799.9
  lines w10 net S$49985: 6050,2185 cw(c6050.24,2184.76) 6050.24,2185.1
  lines w10 net S$49995: 5902.43,2122.37 ccw(c5902.2,2122.6) 5902.53,2122.59
  lines w10 net S$50005: 2050.1,1700.1 ccw(c2050.34,1700.34) 2050.34,1700
  lines w10 net S$50015: 2009.79,3760 cw(c2009.06,3759.26) 2010.1,3759.26
  lines w10 net S$8176: 2009.8,3760 cw(c2049.7,3760.1) 2050,3800 ; 2010.1,1740.3 ccw(c2050,1740) 2050.1,1700.1 ; 6969.7,2185.1 ccw(c6970,2225) 7009.9,2225.1 ; 6969.9,3799.9 cw(c6970,3760) 7009.9,3759.7

## Silkscreen, mask and mechanical layers (free items; w line width, h text height)
Top Overlay:
  lines w9.84 net S$717304: 6090,2860 6090,2575 6765,2575 6765,2865 6090,2865
  lines w10: 3105,2875 4100,2875 4100,3255 3105,3255 3105,2875 ; 3460,1900 4062.5,1900 4062.5,2215 3460,2215 3460,1900
  text "SM" at 3470,2966.26 h157.48
  text "ENGINEERING" at 3145,2851.85 h106.3
  text "ESPDMX" at 6145,2661.85 h106.3
  text "DEVKIT V.1" at 6195,2580.47 h59.05
  text "I2C" at 6760,2435.47 h59.05
  text "GND" at 5979.56,2249.56 h29.53 r315
  text "5V" at 6089.56,2244.56 h29.53 r315
  text "SDA" at 6189.56,2244.56 h29.53 r315
  text "SCL" at 6294.56,2244.56 h29.53 r315
  text "GND" at 3490,2122.5 h45
  text "3V3" at 3700,2122.5 h45
  text "5V" at 3945,2117.5 h45
Bottom Overlay:
  lines w10 net S$1072947: 2850,1860 4310,1860 ; 2850,3655 4310,3655
  text "IO1 /CLK3/TXD0" at 3122.5,3635 h45 r90
  text "IO22 /SCL/RTS0" at 3022.5,3630 h45 r90
  text "IO3 /CLK2/RXD0" at 3227.5,3630 h45 r90
  text "IO19 /MISO/CTS0" at 3427.5,3630 h45 r90
  text "IO17 /TXD2/DMX_TX" at 3727.5,3630 h45 r90
  text "IO16 /RXD2/DMX_RX" at 3827.5,3630 h45 r90
  text "IO4 /ADC2_0" at 3927.5,3630 h45 r90
  text "IO2 /ADC2_2" at 4032.5,3630 h45 r90
  text "IO15 /ADC2_3" at 4127.5,3630 h45 r90
  text "GND" at 4227.5,3630 h45 r90
  text "VDD_33" at 4327.5,3630 h45 r90
  text "I023 /MOSI" at 2927.47,3628.82 h45 r87
  text "IO21 /SDA" at 3327.49,3629.21 h45 r88
  text "IO18 /SCK" at 3522.47,3628.82 h45 r87
  text "IO5 /SS" at 3627.47,3628.82 h45 r87
  text "SENSE_VP/INPUT/ADC1_0/ I36" at 3022.5,2930 h45 r90
  text "SENSE_VN/INPUT/ADC1_3/ I39" at 3122.5,2930 h45 r90
  text "ADC2_7/DMX_EN/ IO27" at 3827.5,2680 h45 r90
  text "DAC2/ADC2_9/ IO26" at 3712.5,2590 h45 r90
  text "DAC1/ADC2_8/ IO25" at 3617.5,2575 h45 r90
  text "INPUT/ADC1_6/ I34" at 3212.5,2535 h45 r90
  text "INPUT/ADC1_7/ I35" at 3317.5,2535 h45 r90
  text "ADC1_4/ IO32" at 3417.49,2354.21 h45 r88
  text "ADC1_5/ IO33" at 3517.49,2349.21 h45 r88
  text "ADC2_6/ IO14" at 3927.49,2349.21 h45 r88
  text "ADC2_5/ IO12" at 4027.49,2349.21 h45 r88
  text "ADC2_4/ IO13" at 4127.49,2349.21 h45 r88
  text "GND" at 4227.5,2005 h45 r90
  text "5V" at 4332.5,1965 h45 r90
  text "EN" at 2922.5,1960 h45 r90